# EAGLE board Board (EAGLE 9.7.0)
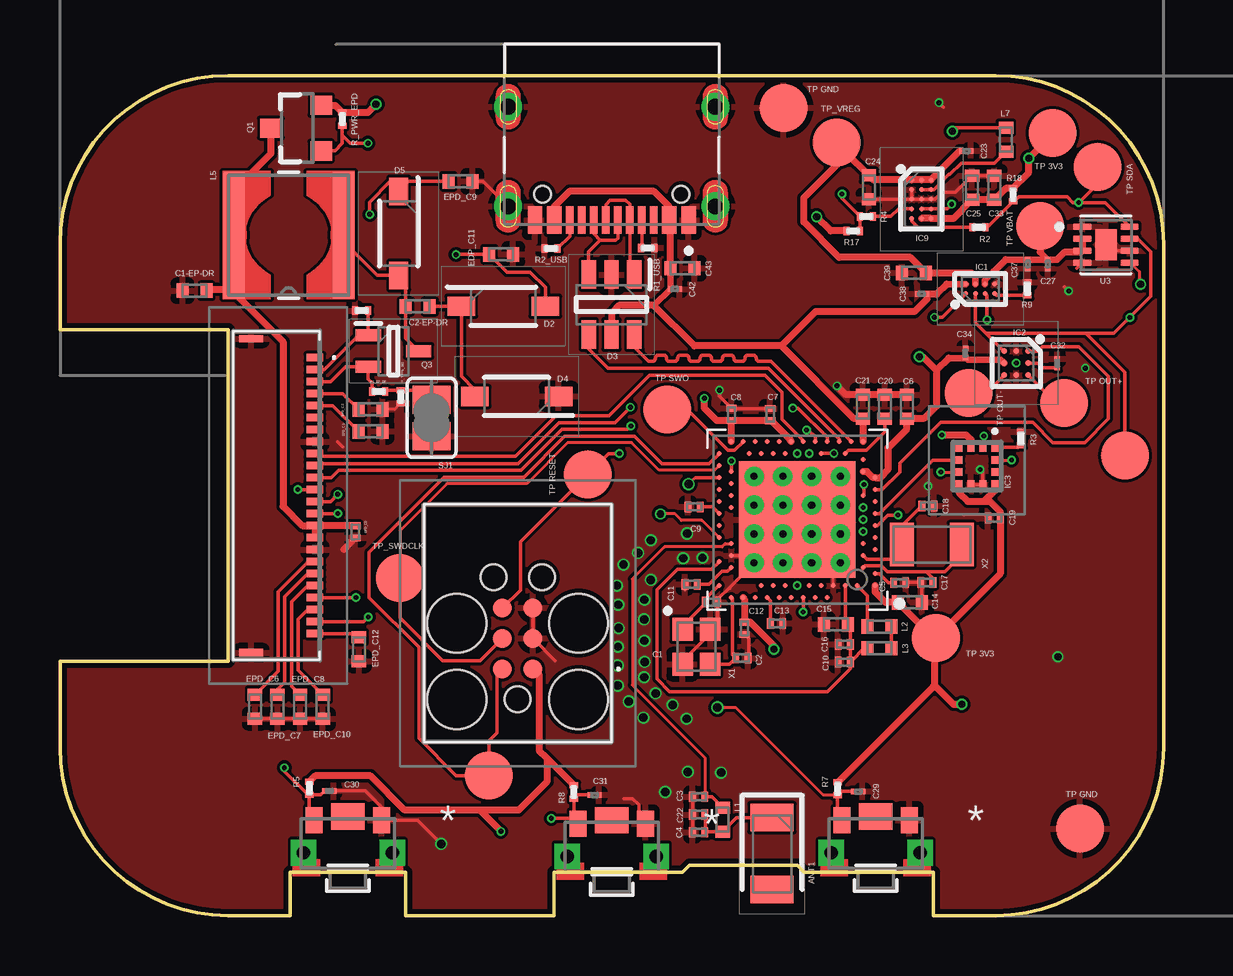
[diagram p0: board, top side]
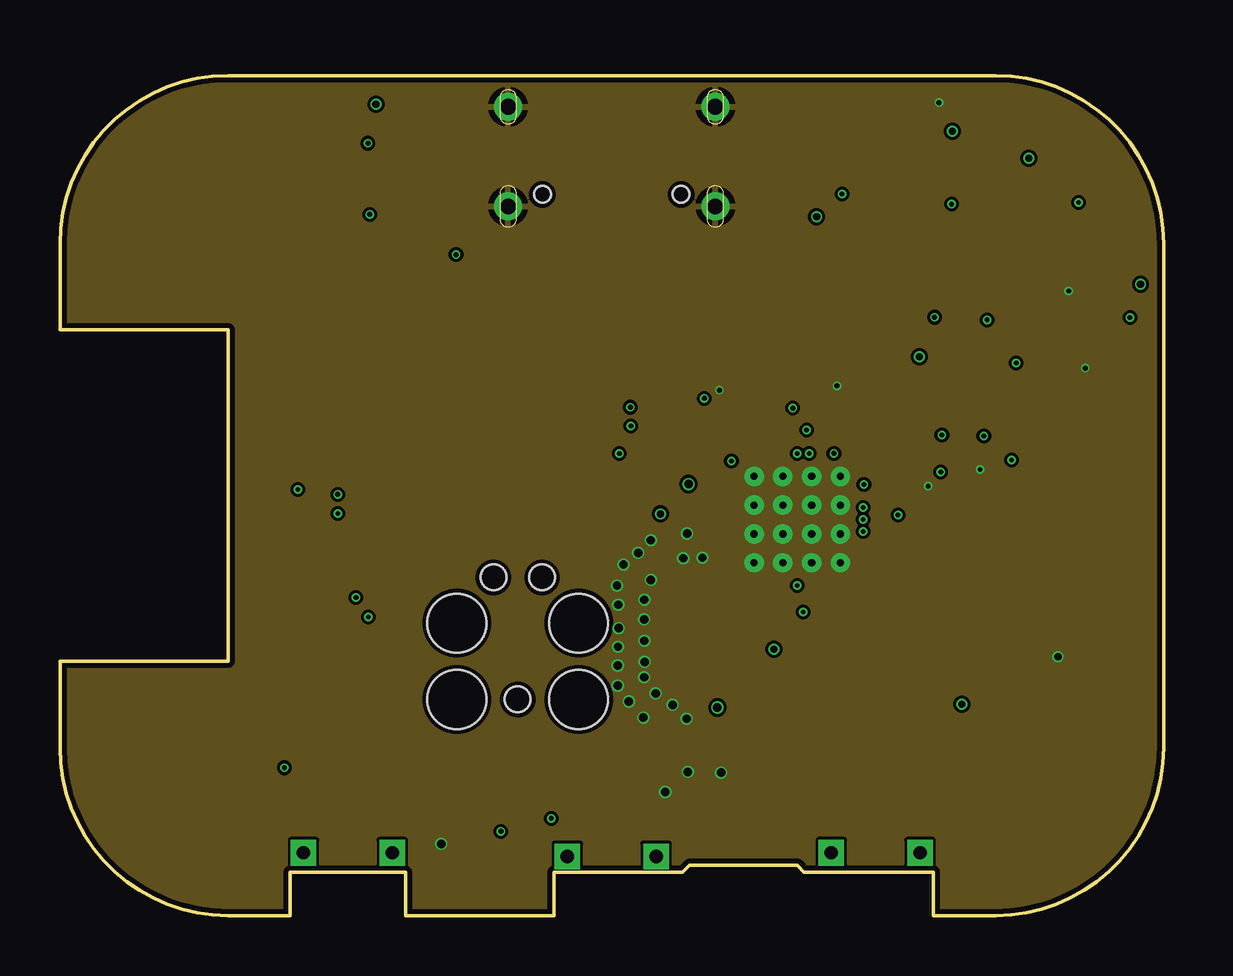
[diagram p1: board, inner layer Route2]
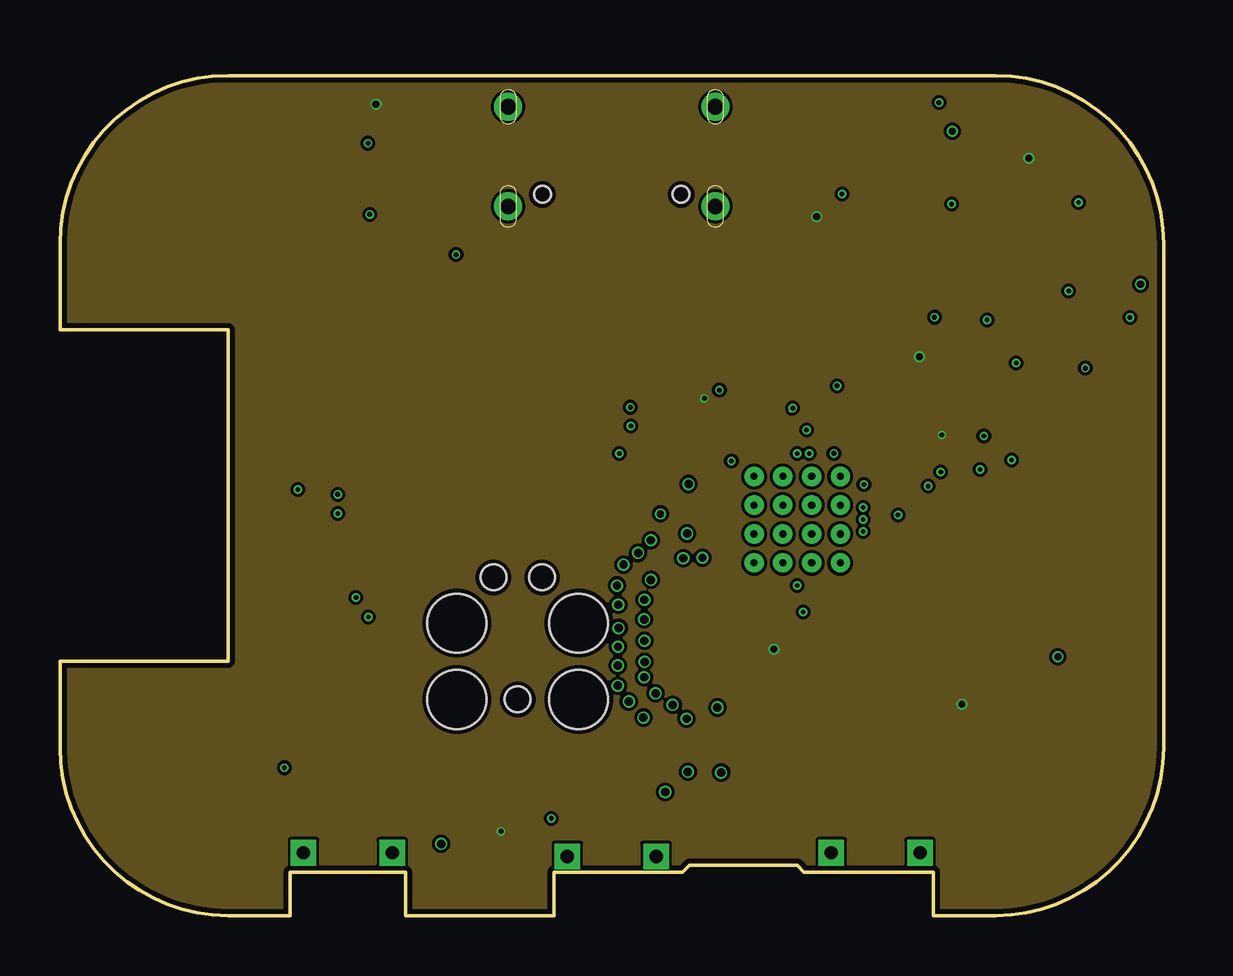
[diagram p2: board, inner layer Route15]
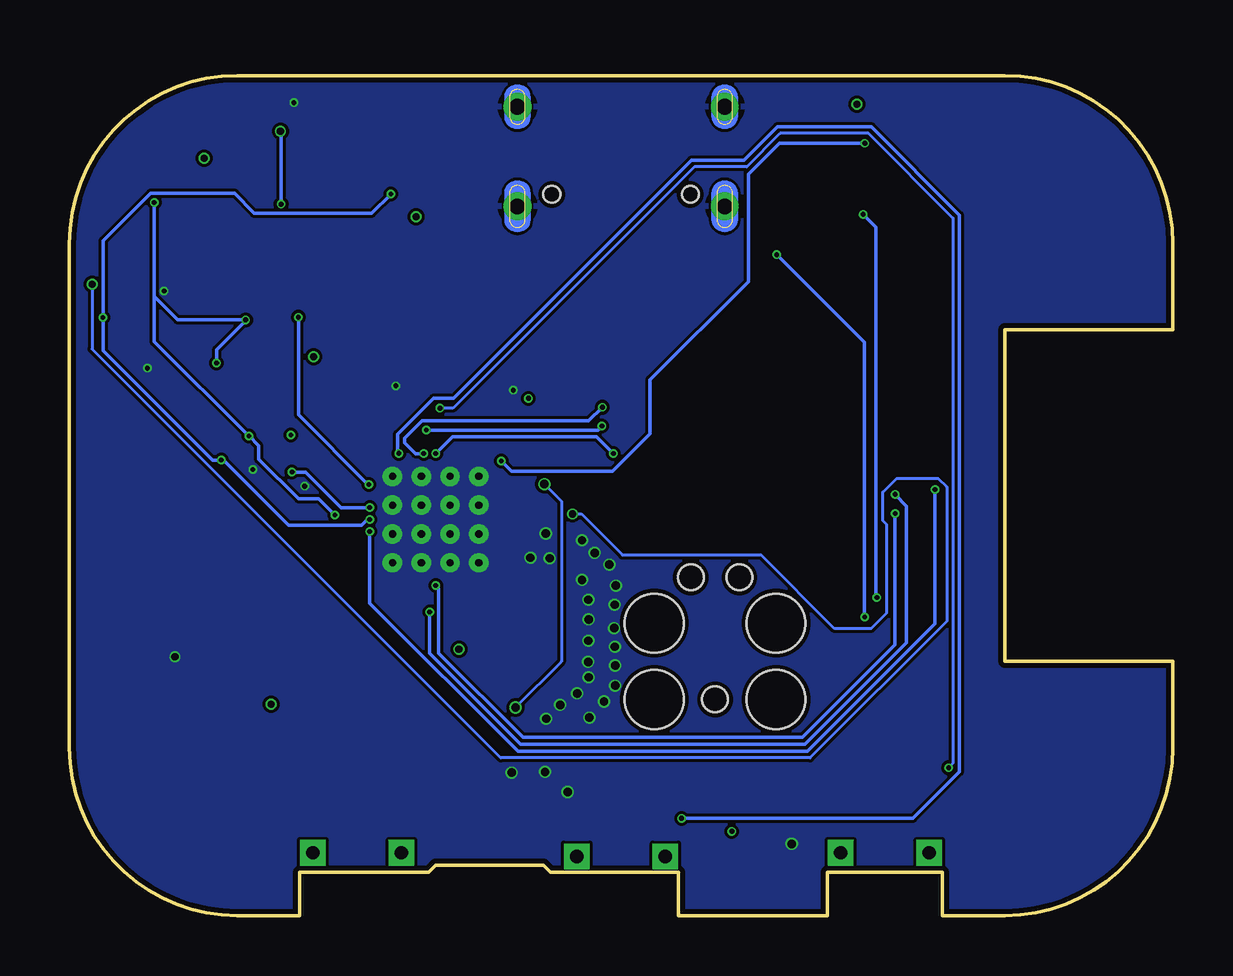
[diagram p3: board, bottom side, seen from below]

Size 46 x 35 mm. Coordinates in mm from the lower left corner, seen from the top.
Outline: 39,0 36.4,0 36.4,1.8 31.6,1.8 31.02,1.8 30.73,2.09 26.24,2.09 25.95,1.8 25.4,1.8 20.6,1.8 20.6,0 14.4,0 14.4,1.8 9.6,1.8 9.6,0 7,0 arc-90 0,7 0,10.6 7,10.6 7,24.4 0,24.4 0,28 arc-90 7,35 39,35 arc-90 46,28 46,7 arc-90 39,0
Copper layers (1+2*15+16): Top 0.035mm / dielectric 1.6mm / Route2 0.035mm / dielectric 0.15mm / Route15 0.035mm / dielectric 0.2mm / Bottom 0.035mm
Design rules "jlcpcb-2layers.dru *": minimum track width 5mil, minimum drill 0.2mm, track to track 5mil, track to pad 5mil, pad to pad 5mil, via to via 5mil, smd to smd 5mil, copper to edge 0.2mm, drill to drill 6mil, minimum pad ring 10mil, minimum via ring 3mil, stop-mask expansion 4mil, vias tented up to drill 999mm, thermal gap 10mil

## Footprints (pad centres in the part's own frame; a part is rotated, then mirrored left to right if it is on the bottom)
2450AT18B100E_ANTC3216X140N = smd 1.15 x 1.8: 1 -1.5,0; 2 1.5,0
NORDIC_NRF_3_RESC0201_L = smd 0.28 x 0.43: 1 -0.255,0; 2 0.255,0
NORDIC_NRF_3_RESC0402_L = smd 0.5 x 0.6: 1 -0.5,0; 2 0.5,0
GRM011R60J152KE01L_2_CAPC0201X13N = smd 0.22 x 0.23: 1 -0.185,0; 2 0.185,0
ESP32_C6_LIBRARY_5_SOD3716X135N = smd 1.15 x 0.8: 1 -1.75,0; 2 1.75,0
ESP32_C6_LIBRARY_3_SOT95P280X145-6N = smd 1.2 x 0.6: 1 -1.25,0.95; 2 -1.25,0; 3 -1.25,-0.95; 4 1.25,-0.95; 5 1.25,0; 6 1.25,0.95
BQ25180YBGR_BGA8C40P2X4_100X155X50 = smd 0.2 x 0.2: A1 -0.2,0.6; A2 0.2,0.6; B1 -0.2,0.2; B2 0.2,0.2; C1 -0.2,-0.2; C2 0.2,-0.2; D1 -0.2,-0.6; D2 0.2,-0.6
DRV2605YZFR_BGA9C50P3X3_144X144X62 = smd 0.25 x 0.25: A1 -0.5,0.5; A2 0,0.5; A3 0.5,0.5; B1 -0.5,0; B2 0,0; B3 0.5,0; C1 -0.5,-0.5; C2 0,-0.5; C3 0.5,-0.5
BMA423_BMA423 = smd 0.3 x 0.35: 1 -0.75,-0.775; 2 -0.25,-0.775; 3 0.25,-0.775; 4 0.75,-0.775; 7 0.75,0.775; 8 0.25,0.775; 9 -0.25,0.775; 10 -0.75,0.775 | smd 0.35 x 0.3: 5 0.775,-0.25; 6 0.775,0.25; 11 -0.775,0.25; 12 -0.775,-0.25
RT6160AWSC_BGA15C40P3X5_140X230X60 = smd 0.216 x 0.216: A1 -0.4,0.8; A2 0,0.8; A3 0.4,0.8; B1 -0.4,0.4; B2 0,0.4; B3 0.4,0.4; C1 -0.4,0; C2 0,0; C3 0.4,0; D1 -0.4,-0.4; D2 0,-0.4; D3 0.4,-0.4; E1 -0.4,-0.8; E2 0,-0.8; E3 0.4,-0.8
503480-2400_5034802400 = smd 0.3 x 0.7: 1 -5.75,1.525; 2 -5.25,1.525; 3 -4.75,1.525; 4 -4.25,1.525; 5 -3.75,1.525; 6 -3.25,1.525; 7 -2.75,1.525; 8 -2.25,1.525; 9 -1.75,1.525; 10 -1.25,1.525; 11 -0.75,1.525; 12 -0.25,1.525; 13 0.25,1.525; 14 0.75,1.525; 15 1.25,1.525; 16 1.75,1.525; 17 2.25,1.525; 18 2.75,1.525; 19 3.25,1.525; 20 3.75,1.525; 21 4.25,1.525; 22 4.75,1.525; 23 5.25,1.525; 24 5.75,1.525 | smd 0.3 x 1: MP1 -6.54,-1.125; MP2 6.54,-1.125
TC2030-IDC_TC2030IDC = smd 0.783 x 0.783: 1 -0.953,-0.635; 2 -0.953,0.635; 3 0.317,-0.635; 4 0.317,0.635; 5 1.588,-0.635; 6 1.588,0.635 | hole 2.451: -2.223,-2.54; -2.223,2.54; 0.952,-2.54; 0.952,2.54 | hole 1.067: -2.223,0; 2.857,-1.016; 2.857,1.016
KH-TYPE-C-16P_KINGHELM_KH-TYPE-C-16P = smd 0.6 x 1.15: A1_B12 -3.2,4.725; A4_B9 -2.4,4.725; A9_B4 2.4,4.725; A12_B1 3.2,4.725 | smd 0.3 x 1.15: A5 -1.25,4.725; A6 -0.25,4.725; A7 0.25,4.725; A8 1.25,4.725; B5 1.75,4.725; B6 0.75,4.725; B7 -0.75,4.725; B8 -1.75,4.725 | drill 0.65 pad 1.05: SH1 -4.32,0; SH2 4.32,0; SH3 -4.32,4.15; SH4 4.32,4.15 | hole 0.7: -2.89,3.65; 2.89,3.65
NORDIC_NRF_2_RESC0402_L = smd 0.5 x 0.6: 1 -0.5,0; 2 0.5,0
ESP32_C6_LIBRARY_2_IND_4828-WE-TPC_WRE = smd 0.9 x 5.3: 1 -2.286,0; 2 2.286,0
ESP32_C6_LIBRARY_4_ESP32_C6_LIBRARY_4_ESP32_C6_LIBRARY_4_ESP32_C6_LIBRARY_4_ESP32_WROVER_SPARKFUN-DISCRETESEMI_SOT23-3 = smd 0.8 x 0.9: 1 -0.95,-1; 2 0.95,-1; 3 0,1.1
ESP32_C6_LIBRARY_6_SOT65P210X110-3N = smd 1.05 x 0.5: 1 -1.05,0.65; 2 -1.05,-0.65; 3 1.05,0
CPF0201D7K68C1_0201 = smd 0.35 x 0.25: 1 0,0.275; 2 0,-0.275
ESP32_C6_LIBRARY_7_JUMPER_SJ = smd 1.168 x 1.6: 1 -0.762,0; 2 0.762,0
2025-10-22_07-23-44_LIBRARY_SW_EVP-AKE31A_PAN = smd 0.711 x 1.092: 1 -1.4,-0.972; 2 1.4,-0.972 | drill 0.559 pad 0.914 square: 3 -1.848,0.381; 4 1.848,0.381 | smd 1.397 x 1.092: 5 0,-1.124
HECTOR_WATCH_1_TP20R = smd 2 x 2: TP 0,0
NORDIC_NRF_4_AQFN50P700X700X85_HS-74N = smd 4.85 x 4.85: P$74 0,0 | drill 0.3 pad 0.6: P$75 -1.8,1.8; P$76 -0.6,1.8; P$77 0.6,1.8; P$78 1.8,1.8; P$79 -1.8,0.6; P$80 -0.6,0.6; P$81 0.6,0.6; P$82 1.8,0.6; P$83 -1.8,-0.6; P$84 -0.6,-0.6; P$85 0.6,-0.6; P$86 1.8,-0.6; P$87 -1.8,-1.8; P$88 -0.6,-1.8; P$89 0.6,-1.8; P$90 1.8,-1.8 | smd 0.2 x 0.2: P$A8 -1.25,3.25; P$A10 -0.75,3.25; P$A12 -0.25,3.25; P$A14 0.25,3.25; P$A16 0.75,3.25; P$A18 1.25,3.25; P$A20 1.75,3.25; P$A22 2.25,3.25; P$A23 2.75,3.25; P$AA24 3.25,-2.25; P$AB2 -2.75,-2.5; P$AC5 -2,-2.75; P$AC9 -1,-2.75; P$AC11 -0.5,-2.75; P$AC13 0,-2.75; P$AC15 0.5,-2.75; P$AC17 1,-2.75; P$AC19 1.5,-2.75; P$AC21 2,-2.75; P$AC24 3.25,-2.75; P$AD2 -2.75,-3.25; P$AD4 -2.25,-3.25; P$AD6 -1.75,-3.25; P$AD8 -1.25,-3.25; P$AD10 -0.75,-3.25; P$AD12 -0.25,-3.25; P$AD14 0.25,-3.25; P$AD16 0.75,-3.25; P$AD18 1.25,-3.25; P$AD20 1.75,-3.25; P$AD22 2.25,-3.25; P$AD23 2.75,-3.25; P$B1 -3.25,2.75; P$B3 -2.5,2.75; P$B5 -2,2.75; P$B7 -1.5,2.75; P$B9 -1,2.75; P$B11 -0.5,2.75; P$B13 0,2.75; P$B15 0.5,2.75; P$B17 1,2.75; P$B19 1.5,2.75; P$B24 3.25,2.75; P$C1 -3.25,2.25; P$D2 -2.75,2; P$D23 2.75,2; P$E24 3.25,1.75; P$F2 -2.75,1.5; P$F23 2.75,1.5; P$G1 -3.25,1.25; P$H2 -2.75,1; P$H23 2.75,1; P$J1 -3.25,0.75; P$J24 3.25,0.75; P$K2 -2.75,0.5; P$L1 -3.25,0.25; P$L24 3.25,0.25; P$M2 -2.75,0; P$N1 -3.25,-0.25; P$N24 3.25,-0.25; P$P2 -2.75,-0.5; P$P23 2.75,-0.5; P$R1 -3.25,-0.75; P$R24 3.25,-0.75; P$T2 -2.75,-1; P$T23 2.75,-1; P$U1 -3.25,-1.25; P$U24 3.25,-1.25; P$V23 2.75,-1.5; P$W1 -3.25,-1.75; P$W24 3.25,-1.75; P$Y2 -2.75,-2; P$Y23 2.75,-2
ESP32_C6_LIBRARY_SON50P200X200X80-9N = smd 0.76 x 0.27: 1 -0.985,0.75; 2 -0.985,0.25; 3 -0.985,-0.25; 4 -0.985,-0.75; 5 0.985,-0.75; 6 0.985,-0.25; 7 0.985,0.25; 8 0.985,0.75 | smd 0.9 x 1.3: 9 0,0
NORDIC_NRF_BT-XTAL_2016_N = smd 0.95 x 0.85: 1 -0.725,-0.575; 2 0.725,-0.575; 3 0.725,0.575; 4 -0.725,0.575
NORDIC_NRF_1_XTAL_3215_N = smd 1 x 1.8: 1 -1.25,0; 2 1.25,0

## Placement (x,y rotation side)
ANT1  2450AT18B100E  [2450AT18B100E_ANTC3216X140N]  29.68,2.58 270 top
C1  12pF  [NORDIC_NRF_3_RESC0201_L]  27.16,13.06 0 top
C1-EP-DR  10μF  [NORDIC_NRF_3_RESC0402_L]  5.61,26.04 180 top
C2  12pF  [NORDIC_NRF_3_RESC0201_L]  28.42,10.73 0 top
C2-EP-DR  4.7μF/25V  [NORDIC_NRF_3_RESC0402_L]  14.91,25.38 180 top
C3  1pF  [NORDIC_NRF_3_RESC0201_L]  26.62,4.95 180 top
C4  1pF  [NORDIC_NRF_3_RESC0201_L]  26.62,3.47 180 top
C5  100nF  [NORDIC_NRF_3_RESC0201_L]  35,13.87 0 top
C6  4.7µF  [NORDIC_NRF_3_RESC0402_L]  35.3,21.21 90 top
C7  100nF  [NORDIC_NRF_3_RESC0201_L]  29.6,20.87 90 top
C8  100nF  [NORDIC_NRF_3_RESC0201_L]  27.99,20.88 90 top
C9  820pF  [NORDIC_NRF_3_RESC0201_L]  26.43,17.03 180 top
C10  N.C.  [NORDIC_NRF_3_RESC0201_L]  32.69,10.56 180 top
C11  100pF  [NORDIC_NRF_3_RESC0201_L]  26.31,13.8 180 top
C12  100nF  [NORDIC_NRF_3_RESC0201_L]  28.53,11.97 270 top
C13  N.C.  [NORDIC_NRF_3_RESC0201_L]  29.87,12.17 0 top
C14  4.7µF  [NORDIC_NRF_3_RESC0402_L]  35.43,13.05 0 top
C15  1.0µF  [NORDIC_NRF_3_RESC0402_L]  32.34,12.13 180 top
C16  47nF  [NORDIC_NRF_3_RESC0201_L]  32.69,11.3 180 top
C17  12pF  [NORDIC_NRF_3_RESC0201_L]  36.13,13.88 0 top
C18  12pF  [NORDIC_NRF_3_RESC0201_L]  36.18,17.07 180 top
C19  100nF  [NORDIC_NRF_3_RESC0201_L]  38.94,16.56 180 top
C20  4.7µF  [NORDIC_NRF_3_RESC0402_L]  34.38,21.2 90 top
C21  4.7µF  [NORDIC_NRF_3_RESC0402_L]  33.47,21.21 90 top
C22  N.C.  [NORDIC_NRF_3_RESC0201_L]  26.62,4.21 180 top
C23  0.1μF  [GRM011R60J152KE01L_2_CAPC0201X13N]  37.78,31.86 180 top
C24  10μF  [NORDIC_NRF_3_RESC0402_L]  33.72,30.34 90 top
C25  22μF  [NORDIC_NRF_3_RESC0402_L]  38.02,30.32 90 top
C27  0.1μF  [GRM011R60J152KE01L_2_CAPC0201X13N]  41.17,27.15 90 top
C29  1μF  [GRM011R60J152KE01L_2_CAPC0201X13N]  33.27,5.17 180 top
C30  1μF  [GRM011R60J152KE01L_2_CAPC0201X13N]  11.23,5.2 180 top
C31  1μF  [GRM011R60J152KE01L_2_CAPC0201X13N]  22.28,5.03 180 top
C32  1μF  [GRM011R60J152KE01L_2_CAPC0201X13N]  41.57,23.01 270 top
C33  22μF  [NORDIC_NRF_3_RESC0402_L]  38.94,30.32 90 top
C34  0.1μF  [GRM011R60J152KE01L_2_CAPC0201X13N]  37.74,23.44 270 top
C37  1μF  [GRM011R60J152KE01L_2_CAPC0201X13N]  40.34,27.15 90 top
C38  1μF  [GRM011R60J152KE01L_2_CAPC0201X13N]  35.92,25.9 0 top
C39  10μF  [NORDIC_NRF_3_RESC0402_L]  35.6,26.78 180 top
C42  0.1μF  [GRM011R60J152KE01L_2_CAPC0201X13N]  25.63,26.1 0 top
C43  4.7μF  [NORDIC_NRF_3_RESC0402_L]  25.95,26.97 0 top
D2  MBR0530  [ESP32_C6_LIBRARY_5_SOD3716X135N]  18.48,25.39 0 top
D3  USBLC6-2SC6Y  [ESP32_C6_LIBRARY_3_SOT95P280X145-6N]  22.99,25.46 270 top
D4  MBR0530  [ESP32_C6_LIBRARY_5_SOD3716X135N]  19.04,21.63 180 top
D5  MBR0530  [ESP32_C6_LIBRARY_5_SOD3716X135N]  14.12,28.42 270 top
EPD_C1  1μF/50V  [NORDIC_NRF_3_RESC0402_L]  12.94,20.17 180 top
EPD_C2  1μF/50V  [NORDIC_NRF_3_RESC0402_L]  12.94,21.09 180 top
EPD_C5  0.1μF/50V  [NORDIC_NRF_3_RESC0201_L]  12.31,15.99 90 top
EPD_C6  1μF/50V  [NORDIC_NRF_3_RESC0402_L]  8.13,8.71 270 top
EPD_C7  1μF/50V  [NORDIC_NRF_3_RESC0402_L]  9.07,8.71 270 top
EPD_C8  1μF/50V  [NORDIC_NRF_3_RESC0402_L]  10.01,8.7 270 top
EPD_C9  1μF/50V  [NORDIC_NRF_3_RESC0402_L]  16.69,30.59 0 top
EPD_C10  1μF/50V  [NORDIC_NRF_3_RESC0402_L]  10.95,8.7 270 top
EPD_C11  1μF/50V  [NORDIC_NRF_3_RESC0402_L]  18.39,27.55 0 top
EPD_C12  1μF/50V  [NORDIC_NRF_3_RESC0402_L]  12.46,11.1 270 top
IC1  BQ25180YBGR  [BQ25180YBGR_BGA8C40P2X4_100X155X50]  38.36,26.11 90 top
IC2  DRV2605YZFR  [DRV2605YZFR_BGA9C50P3X3_144X144X62]  39.86,23.02 270 top
IC3  BMA423_BMA423  [BMA423_BMA423]  38.22,18.73 180 top
IC9  RT6160AWSC  [RT6160AWSC_BGA15C40P3X5_140X230X60]  35.91,29.85 0 top
J1  503480-2400  [503480-2400_5034802400]  9.1,17.5 270 top
J2  TC2030-IDC  [TC2030-IDC_TC2030IDC]  19.08,11.23 90 top
J4  KH-TYPE-C-16P  [KH-TYPE-C-16P_KINGHELM_KH-TYPE-C-16P]  23,33.7 180 top
L1  3.9nH  [NORDIC_NRF_2_RESC0402_L]  27.62,4 270 top
L2  10µH  [NORDIC_NRF_2_RESC0402_L]  34.15,12.04 0 top
L3  15nH  [NORDIC_NRF_2_RESC0402_L]  34.16,11.14 180 top
L5  68uH  [ESP32_C6_LIBRARY_2_IND_4828-WE-TPC_WRE]  9.53,28.35 180 top
L7  [NORDIC_NRF_2_RESC0402_L]  39.43,32.33 90 top
Q1  20V/4.2A/52mΩ/1.4W  [ESP32_C6_LIBRARY_4_ESP32_C6_LIBRARY_4_ESP32_C6_LIBRARY_4_ESP32_C6_LIBRARY_4_ESP32_WROVER_SPARKFUN-DISCRETESEMI_SOT23-3]  9.89,32.81 90 top
Q3  SI1308EDL-T1-GE3  [ESP32_C6_LIBRARY_6_SOT65P210X110-3N]  13.9,23.52 0 top
R1_EP_DR  0.47  [CPF0201D7K68C1_0201]  13.28,21.83 270 top
R1_USB  5K1  [CPF0201D7K68C1_0201]  24.5,27.82 270 top
R2  0  [CPF0201D7K68C1_0201]  38.3,28.68 270 top
R2_EP_DR  10K  [CPF0201D7K68C1_0201]  12.57,25.21 90 top
R2_USB  5K1  [CPF0201D7K68C1_0201]  20.47,27.8 270 top
R3  0  [CPF0201D7K68C1_0201]  40.05,19.88 0 top
R4  0  [CPF0201D7K68C1_0201]  33.62,29.13 90 top
R5  10K  [CPF0201D7K68C1_0201]  10.39,5.3 180 top
R7  10K  [CPF0201D7K68C1_0201]  32.41,5.29 180 top
R8  10K  [CPF0201D7K68C1_0201]  21.42,5.15 180 top
R9  10K  [CPF0201D7K68C1_0201]  40.32,26.12 0 top
R17  3K3  [CPF0201D7K68C1_0201]  33.06,28.53 90 top
R18  3K3  [CPF0201D7K68C1_0201]  39.73,30.03 0 top
R_PWR_EPD  10K  [CPF0201D7K68C1_0201]  11.77,33.19 180 top
R_TYPE_SEL  2.2  [CPF0201D7K68C1_0201]  14.21,21.62 180 top
SJ1  [ESP32_C6_LIBRARY_7_JUMPER_SJ]  15.49,20.74 90 top
SW_DN  2025-10-22_07-23-44_LIBRARY_EVP-AKE31ASW_EVP-AKE31A_PAN  [2025-10-22_07-23-44_LIBRARY_SW_EVP-AKE31A_PAN]  34,3 180 top
SW_ENT  2025-10-22_07-23-44_LIBRARY_EVP-AKE31ASW_EVP-AKE31A_PAN  [2025-10-22_07-23-44_LIBRARY_SW_EVP-AKE31A_PAN]  23,2.85 180 top
SW_UP  2025-10-22_07-23-44_LIBRARY_EVP-AKE31ASW_EVP-AKE31A_PAN  [2025-10-22_07-23-44_LIBRARY_SW_EVP-AKE31A_PAN]  12,3 180 top
TP_3.3V  HECTOR_WATCH_1_TPTP20R  [HECTOR_WATCH_1_TP20R]  36.51,11.56 0 top
TP_3V3  HECTOR_WATCH_1_TPTP20R  [HECTOR_WATCH_1_TP20R]  41.37,32.6 0 top
TP_BAT_GND  HECTOR_WATCH_1_TPTP20R  [HECTOR_WATCH_1_TP20R]  30.16,33.65 90 top
TP_GND  HECTOR_WATCH_1_TPTP20R  [HECTOR_WATCH_1_TP20R]  42.52,3.62 0 top
TP_ON  HECTOR_WATCH_1_TPTP20R  [HECTOR_WATCH_1_TP20R]  37.88,21.77 180 top
TP_OP  HECTOR_WATCH_1_TPTP20R  [HECTOR_WATCH_1_TP20R]  41.86,21.35 180 top
TP_RESET  HECTOR_WATCH_1_TPTP20R  [HECTOR_WATCH_1_TP20R]  22,18.38 0 top
TP_SCL  HECTOR_WATCH_1_TPTP20R  [HECTOR_WATCH_1_TP20R]  44.39,19.17 0 top
TP_SDA  HECTOR_WATCH_1_TPTP20R  [HECTOR_WATCH_1_TP20R]  43.25,31.2 270 top
TP_SWDCLK  HECTOR_WATCH_1_TPTP20R  [HECTOR_WATCH_1_TP20R]  14.17,14.07 90 top
TP_SWDIO  HECTOR_WATCH_1_TPTP20R  [HECTOR_WATCH_1_TP20R]  17.88,5.83 90 top
TP_SWO  HECTOR_WATCH_1_TPTP20R  [HECTOR_WATCH_1_TP20R]  25.32,21.08 0 top
TP_VBAT  HECTOR_WATCH_1_TPTP20R  [HECTOR_WATCH_1_TP20R]  40.86,28.74 0 top
TP_VREG  HECTOR_WATCH_1_TPTP20R  [HECTOR_WATCH_1_TP20R]  32.37,32.22 0 top
U1  NORDIC_NRF_4_NRF52840_QF  [NORDIC_NRF_4_AQFN50P700X700X85_HS-74N]  30.73,16.5 180 top
U3  MAX17048G+T10  [ESP32_C6_LIBRARY_SON50P200X200X80-9N]  43.6,27.95 0 top
X1  32MHz  [NORDIC_NRF_BT-XTAL_2016_N]  26.53,11.2 270 top
X2  32.768kHz  [NORDIC_NRF_1_XTAL_3215_N]  36.34,15.46 180 top

## Library data of the parts
ANT1 = InkTime_v5; ARROW_PART_NUMBER: 2450AT18B100E; ARROW_PRICE-STOCK: https://www.arrow.com/en/products/2450at18b100e/johanson-dielectrics?utm_currency=USD&region=nac; DESCRIPTION: Antennas 2.45GHz ANTENNA; HEIGHT: 1.4mm; MANUFACTURER_NAME: JOHANSON TECHNOLOGY; MANUFACTURER_PART_NUMBER: 2450AT18B100E; MOUSER_PART_NUMBER: 609-2450AT18B100E; MOUSER_PRICE-STOCK: https://www.mouser.co.uk/ProductDetail/Johanson-Technology/2450AT18B100E?qs=yCnrNFeXz%252Bh5MFsFIXGZGA%3D%3D
C1 C1-EP-DR C2 C2-EP-DR C3-C22 C24 C25 C33 C39 C43 EPD_C1 EPD_C2 EPD_C5-EPD_C12 L1-L3 L7 R1_EP_DR R1_USB R2 R2_EP_DR R2_USB R3-R5 R7-R9 R17 R18 R_PWR_EPD R_TYPE_SEL SJ1 TP_3.3V TP_3V3 TP_BAT_GND TP_GND TP_ON TP_OP TP_RESET TP_SCL TP_SDA TP_SWDCLK TP_SWDIO TP_SWO TP_VBAT TP_VREG U1 X1 X2 = InkTime_v5
C23 C27 C29-C32 C34 C37 C38 C42 = InkTime_v5; AVAILABILITY: In Stock; CHECK_PRICES: https://www.snapeda.com/parts/GRM011R60J152KE01L/Murata/view-part/?ref=eda; DESCRIPTION: SMD Capacitor X5R(EIA) with Capacitance: 1500pF Tol. 10%. Rated Voltage: 6.3Vdc; MF: Murata; MP: GRM011R60J152KE01L; PACKAGE: 0201 Murata; PRICE: None; SNAPEDA_LINK: https://www.snapeda.com/parts/GRM011R60J152KE01L/Murata/view-part/?ref=snap
D2 D4 D5 = InkTime_v5; AVAILABILITY: In Stock; CHECK_PRICES: https://www.snapeda.com/parts/MBR0530/Onsemi/view-part/?ref=eda; DESCRIPTION: Diode Schottky 30 V 500mA Surface Mount SOD-123; MF: ON Semiconductor; MP: MBR0530; PACKAGE: SOD-123-2 ON Semiconductor; PRICE: None; PURCHASE-URL: https://www.snapeda.com/api/url_track_click_mouser/?unipart_id=179458&manufacturer=ON Semiconductor&part_name=MBR0530&search_term=None; SNAPEDA_LINK: https://www.snapeda.com/parts/MBR0530/Onsemi/view-part/?ref=snap
D3 = InkTime_v5; AVAILABILITY: In Stock; CHECK_PRICES: https://www.snapeda.com/parts/USBLC6-2SC6Y/STMicroelectronics/view-part/?ref=eda; DESCRIPTION: 17V Clamp 5A (8/20µs) Ipp Tvs Diode Surface Mount SOT-23-6; MF: STMicroelectronics; MP: USBLC6-2SC6Y; PACKAGE: SOT-23-6 STMicroelectronics; PRICE: None; SNAPEDA_LINK: https://www.snapeda.com/parts/USBLC6-2SC6Y/STMicroelectronics/view-part/?ref=snap
IC1 = InkTime_v5; ARROW_PART_NUMBER: BQ25180YBGR; ARROW_PRICE-STOCK: https://www.arrow.com/en/products/bq25180ybgr/texas-instruments?utm_currency=USD&region=nac; DESCRIPTION: Charger IC Lithium Ion/Polymer, Lithium Iron Phosphate 8-DSBGA (1.6x1.1); HEIGHT: 0.5mm; MANUFACTURER_NAME: Texas Instruments; MANUFACTURER_PART_NUMBER: BQ25180YBGR; MOUSER_PART_NUMBER: 595-BQ25180YBGR; MOUSER_PRICE-STOCK: https://www.mouser.co.uk/ProductDetail/Texas-Instruments/BQ25180YBGR?qs=doiCPypUmgEWjAK%252BJAX6Tw%3D%3D
IC2 = InkTime_v5; ARROW_PART_NUMBER: DRV2605YZFR; ARROW_PRICE-STOCK: https://www.arrow.com/en/products/drv2605yzfr/texas-instruments?region=nac; DESCRIPTION: Haptic Driver for ERM/LRA with Built-In Library and Smart Loop Architecture; HEIGHT: 0.625mm; MANUFACTURER_NAME: Texas Instruments; MANUFACTURER_PART_NUMBER: DRV2605YZFR
IC3 = InkTime_v5; ARROW_PART_NUMBER: BMA423; ARROW_PRICE-STOCK: https://www.arrow.com/en/products/bma423/bosch; DESCRIPTION: Accelerometers Triaxial low-g 12bit Acceleration Sensor; HEIGHT: 1mm; MANUFACTURER_NAME: BOSCH; MANUFACTURER_PART_NUMBER: BMA423; MOUSER_PART_NUMBER: 262-BMA423; MOUSER_PRICE-STOCK: https://www.mouser.co.uk/ProductDetail/Bosch-Sensortec/BMA423?qs=HXFqYaX1Q2xC%252BSgeGoX3mg%3D%3D
IC9 = InkTime_v5; DESCRIPTION: Buck-Boost Regulator Positive Output Step-Up/Step-Down I2C DC-DC Controller IC 15-WL-CSP (BSC) (1.4x2.3); HEIGHT: 0.6mm; MANUFACTURER_NAME: RICHTEK; MANUFACTURER_PART_NUMBER: RT6160AWSC; MOUSER_PART_NUMBER: 835-RT6160AWSC; MOUSER_PRICE-STOCK: https://www.mouser.co.uk/ProductDetail/Richtek/RT6160AWSC?qs=amGC7iS6iy%2FLd9PSoixZXQ%3D%3D
J1 = InkTime_v5; DESCRIPTION: FFC & FPC Connectors 0.5mm FPC RA SMT Dual Contact 24Ckt; HEIGHT: 1.87mm; MANUFACTURER_NAME: Molex; MANUFACTURER_PART_NUMBER: 503480-2400; MOUSER_PART_NUMBER: 538-503480-2400; MOUSER_PRICE-STOCK: https://www.mouser.co.uk/ProductDetail/Molex/503480-2400?qs=OAhjpuo3Vu7efIoxFh9AOw%3D%3D
J2 = InkTime_v5; DESCRIPTION: CABLE ADAPTER 6 POS; HEIGHT: 19mm; MANUFACTURER_NAME: Tag Connect; MANUFACTURER_PART_NUMBER: TC2030-IDC
J4 = InkTime_v5; AVAILABILITY: Not in stock; CHECK_PRICES: https://www.snapeda.com/parts/KH-TYPE-C-16P/Kinghelm/view-part/?ref=eda; MF: kinghelm; MP: KH-TYPE-C-16P; PACKAGE: None; PRICE: None; SNAPEDA_LINK: https://www.snapeda.com/parts/KH-TYPE-C-16P/Kinghelm/view-part/?ref=snap
L5 = InkTime_v5; COPYRIGHT: Copyright (C) 2024 Ultra Librarian. All rights reserved.; MANUFACTURER_PART_NUMBER: 744043680; MFR_NAME: Wurth Electronics
Q1 = InkTime_v5; PROD_ID: TRAN-14388
Q3 = InkTime_v5; AVAILABILITY: In Stock; CHECK_PRICES: https://www.snapeda.com/parts/SI1308EDL-T1-GE3/Vishay+Siliconix/view-part/?ref=eda; DESCRIPTION: Si1308EDL-T1-GE3 N-channel MOSFET Transistor, 1.5 A, 30 V, 3-Pin SC-70 | Siliconix / Vishay SI1308EDL-T1-GE3; MF: Vishay Siliconix; MP: SI1308EDL-T1-GE3; PACKAGE: SOT-323 Vishay Semiconductor; PRICE: None; PURCHASE-URL: https://www.snapeda.com/api/url_track_click_mouser/?unipart_id=274603&manufacturer=Vishay Siliconix&part_name=SI1308EDL-T1-GE3&search_term=None; SNAPEDA_LINK: https://www.snapeda.com/parts/SI1308EDL-T1-GE3/Vishay+Siliconix/view-part/?ref=snap
SW_DN SW_ENT SW_UP = InkTime_v5; COPYRIGHT: Copyright (C) 2025 Ultra Librarian. All rights reserved.; DIGI-KEY_PART_NUMBER_1: P123437TR-ND; DIGI-KEY_PART_NUMBER_2: P123437CT-ND; DIGI-KEY_PART_NUMBER_3: P123437DKR-ND; MANUFACTURER_NAME: Panasonic; MANUFACTURER_PART_NUMBER: EVP-AKE31A
U3 = InkTime_v5; AVAILABILITY: In Stock; CHECK_PRICES: https://www.snapeda.com/parts/MAX17048G+T10/Analog+Devices/view-part/?ref=eda; DESCRIPTION: 3µA 1-Cell/2-Cell Fuel Gauge with ModelGauge; MF: Analog Devices; MP: MAX17048G+T10; PACKAGE: TDFN-8 Maxim; PRICE: None; PURCHASE-URL: https://www.snapeda.com/api/url_track_click_mouser/?unipart_id=329239&manufacturer=Analog Devices&part_name=MAX17048G+T10&search_term=None; SNAPEDA_LINK: https://www.snapeda.com/parts/MAX17048G+T10/Analog+Devices/view-part/?ref=snap

## Nets
3V3: C6.1 C7.1 C8.1 C12.1 C14.1 C19.1 C25.1 C33.1 C34.2 IC2.C2 IC3.3 IC3.7 IC3.10 IC9.E2 IC9.E3 J2.1 Q1.2 R5.2 R7.2 R8.2 R17.1 R18.1 R_PWR_EPD.2 TP_3.3V.TP TP_3V3.TP U1.P$A22 U1.P$AD14 U1.P$AD23 U1.P$B1 U1.P$W1 U1.P$Y2
ALERT: U1.P$J24 U3.5
D+: D3.4 U1.P$AD6
D-: D3.6 U1.P$AD4
DEC1: C5.1 U1.P$C1
DEC3: C11.1 U1.P$D23
DEC4_6: C10.1 C15.1 C16.1 L3.2 U1.P$B5 U1.P$E24
DN: D3.1 J4.A7 J4.B7
DP: D3.3 J4.A6 J4.B6
EPD_3V3: C1-EP-DR.1 EPD_C5.2 J1.15 J1.16 L5.2 Q1.3
EPD_BUSY: J1.9 U1.P$AD12
EPD_CS: J1.12 U1.P$K2
EPD_DC: J1.11 U1.P$AD10
EPD_RST: J1.10 U1.P$AC11
GDR: J1.2 Q3.1 R2_EP_DR.2
GND: C1-EP-DR.2 C1.2 C2.2 C3.2 C4.2 C5.2 C6.2 C7.2 C8.2 C9.2 C10.2 C11.2 C12.2 C13.2 C14.2 C15.2 C16.2 C17.1 C18.1 C19.2 C20.2 C21.2 C22.2 C23.1 C24.1 C25.2 C27.1 C29.1 C30.1 C31.1 C32.1 C33.2 C34.1 C37.1 C38.1 C39.2 C42.2 C43.2 D3.2 D4.1 EPD_C1.1 EPD_C2.1 EPD_C5.1 EPD_C6.2 EPD_C7.2 EPD_C8.2 EPD_C9.2 EPD_C10.2 EPD_C11.2 EPD_C12.2 IC1.D2 IC2.B1 IC2.B3 IC3.8 IC3.9 IC9.B1 IC9.C1 IC9.C2 IC9.C3 J1.8 J1.17 J1.MP1 J1.MP2 J2.3 J2.5 J4.A1_B12 J4.A12_B1 J4.SH1 J4.SH2 J4.SH3 J4.SH4 R1_USB.1 R2_EP_DR.1 R2_USB.2 R3.1 R9.1 R_TYPE_SEL.1 SJ1.1 SW_DN.1 SW_ENT.1 SW_UP.1 TP_BAT_GND.TP TP_GND.TP U1.P$74 U1.P$75 U1.P$76 U1.P$77 U1.P$78 U1.P$79 U1.P$80 U1.P$81 U1.P$82 U1.P$83 U1.P$84 U1.P$85 U1.P$86 U1.P$87 U1.P$88 U1.P$89 U1.P$90 U1.P$B7 U1.P$F23 U3.1 U3.4 U3.6 U3.9 X1.2 X1.4
HAPTIC_EN: IC2.A1 U1.P$U1
IMU_INT1: IC3.5 U1.P$N1
IMU_INT2: IC3.6 U1.P$P2
LX1: IC9.B2 IC9.B3 L7.1
LX2: IC9.D2 IC9.D3 L7.2
MOSI: J1.14 U1.P$B13
N$1: C9.1 U1.P$N24
N$2: ANT1.1 C4.1 C22.1 L1.2
N$3: C3.1 L1.1 U1.P$H23
N$4: C13.1 U1.P$A18
N$5: C2.1 U1.P$A23 X1.3
N$6: C1.1 U1.P$B24 X1.1
N$7: L2.2 L3.1
N$8: L2.1 U1.P$B3
N$9: C18.2 U1.P$F2 X2.2
N$10: C17.2 U1.P$D2 X2.1
N$11: IC3.1 R3.2
N$12: C20.1 U1.P$AC5
N$13: IC1.D1 R9.2
N$14: IC9.D1 R4.2
N$15: IC9.E1 R2.2
N$16: R1_EP_DR.1 R_TYPE_SEL.2 SJ1.2
N$17: C2-EP-DR.1 D2.1 D4.2
N$18: EPD_C2.2 J1.4
N$19: C2-EP-DR.2 D5.2 L5.1 Q3.3
N$20: EPD_C1.2 J1.5
N$21: EPD_C6.1 J1.18
N$22: C32.2 IC2.A2
N$23: EPD_C7.1 J1.19
N$24: EPD_C8.1 J1.20
N$25: EPD_C10.1 J1.22
N$28: EPD_C12.1 J1.24
N$29: J4.B5 R2_USB.1
N$30: J4.A5 R1_USB.2
OUT+: IC2.A3 TP_OP.TP
OUT-: IC2.C3 TP_ON.TP
P0.04: U1.P$J1
P0.09: U1.P$L24
P0.13: C30.2 R5.1 SW_UP.2 U1.P$AD8
P0.14: C31.2 R8.1 SW_ENT.2 U1.P$AC9
P0.19: U1.P$AC15
P0.20: U1.P$AD16
P0.21: U1.P$AC17
P0.22: U1.P$AD18
P0.23: U1.P$AC19
P0.24: U1.P$AD20
P0.25: U1.P$AC21
P0.26: U1.P$G1
P0.27: U1.P$H2
P0.28: U1.P$B11
P0.29: U1.P$A10
P0.30: U1.P$B9
P0.31: U1.P$A8
P1.01: Q1.1 R_PWR_EPD.1 U1.P$Y23
P1.02: C29.2 R7.1 SW_DN.2 U1.P$W24
P1.03: U1.P$V23
P1.04: U1.P$U24
P1.05: U1.P$T23
P1.06: U1.P$R24
P1.07: U1.P$P23
P1.09: U1.P$R1
P1.10: U1.P$A20
P1.11: U1.P$B19
P1.12: U1.P$B17
P1.13: U1.P$A16
P1.14: U1.P$B15
P1.15: U1.P$A14
PMIC_INT: IC1.A1 U1.P$T2
PREVGH: D5.1 EPD_C9.1 J1.21
PREVGL: D2.2 EPD_C11.1 J1.23
RESE: J1.3 Q3.2 R1_EP_DR.2
RESET: J2.6 TP_RESET.TP U1.P$AC13
SCK: J1.13 U1.P$A12
SCL: IC1.B1 IC2.C1 IC3.12 R4.1 R17.2 TP_SCL.TP U1.P$M2 U3.7
SDA: IC1.C1 IC2.B2 IC3.2 R2.1 R18.2 TP_SDA.TP U1.P$L1 U3.8
SWDCLK: J2.4 TP_SWDCLK.TP U1.P$AA24
SWDIO: J2.2 TP_SWDIO.TP U1.P$AC24
SWO: TP_SWO.TP U1.P$AD22
VBAT: C27.2 C37.2 IC1.C2 TP_VBAT.TP U3.2 U3.3
VBUS: C21.1 C38.2 C42.1 C43.1 D3.5 IC1.A2 J4.A4_B9 J4.A9_B4 U1.P$AD2
VREG: C23.2 C24.2 C39.1 IC1.B2 IC9.A1 IC9.A2 IC9.A3 TP_VREG.TP

## Tracks (layer width: path | path; a pad name or v marks a point on that pad's centre or on a via)
3V3  (via drill 0.2, 0.3)
  Top 0.268: IC2.C2 39.23,23.16 37.84,23.16 C34.2 37.71,23.23 37.05,23.23
  Top 0.3: C14.1 34.41,13.05 33.98,13.48 U1.P$B1 | C14.1 34.93,12.91 | TP_3.3V.TP 36.45,11.5 36.45,9.54 | R7.2 32.43,5.56 36.4,9.54 36.45,9.54 | IC9.E2 IC9.E3 37.25,29.05 C25.1 C33.1 39.42,30.3 R18.1 40.38,30.96 v40.38,31.56 41.37,32.55 TP_3V3.TP | R8.2 20.3,6.54 | 20.3,6.54 19.97,6.88 19.97,10.02 J2.1 | R5.2 10.64,5.82 12.94,5.82 14.37,4.39 17.5,4.39 | IC3.7 37.47,17.62 37.84,17.26 38.52,17.26 | U1.P$AD23 C8.1 | C8.1 C7.1 29.66,20.62 30.43,19.84 30.43,19.8 U1.P$AD14 | 20.3,6.54 20.3,5.57 19.12,4.39 17.5,4.39 | Q1.2 11.47,33.76 R_PWR_EPD.2 12.84,33.47 v13.17,33.8 | U1.P$A22 28.53,13.2 C12.1 28.77,12.22 29.76,11.24 v29.76,11.1 | U1.P$Y2 33.64,18.5 33.89,18.25 U1.P$W1 34.19,18.25 34.51,18.57 34.51,19.48 35.3,20.27 C6.1 36.01,20.71 36.55,21.25 36.54,21.26 36.54,22.72 | IC2.C2 39.3,23.08 | 37.05,23.23 36.54,22.72 | v37.59,8.8 37.24,8.8 36.51,9.54 36.45,9.54 | 17.5,4.39 v18.38,3.51 | C8.1 27.38,20.62 26.86,21.14 v26.86,21.55 | IC3.3 37.97,19.83 37.78,20.02 v36.76,20.02 | TP_3.3V.TP 39.2,14.25 C19.1 39.2,16.83 38.76,17.27 38.73,17.27 38.72,17.26 38.52,17.26 | TP_3.3V.TP 36.13,11.56 36.13,11.85 C14.1 | 36.54,22.72 36.53,22.72 35.97,23.28 v35.82,23.28 | IC3.10 38.97,17.71 38.52,17.26 | R17.1 32.13,28.53 v31.54,29.12
  pour Route15: 31.56,1.86 31.58,1.88 36.42,1.88 36.44,1.86 36.46,1.84 36.48,1.82 36.48,0.08 39,0.08 39.78,0.12 40.54,0.25 41.29,0.46 42,0.76 42.68,1.14 43.32,1.59 43.9,2.1 44.41,2.68 44.86,3.32 45.24,4 45.54,4.71 45.75,5.46 45.88,6.22 45.92,7 45.92,28 45.88,28.78 45.75,29.54 45.54,30.29 45.24,31 44.86,31.68 44.41,32.32 43.9,32.9 43.32,33.41 42.68,33.86 42,34.24 41.29,34.54 40.54,34.75 39.78,34.88 39,34.92 7,34.92 6.22,34.88 5.46,34.75 4.71,34.54 4,34.24 3.32,33.86 2.68,33.41 2.1,32.9 1.59,32.32 1.14,31.68 0.76,31 0.46,30.29 0.25,29.54 0.12,28.78 0.08,28 0.08,24.48 7.02,24.48 7.04,24.46 7.06,24.44 7.08,24.42 7.08,10.58 7.06,10.56 7.04,10.54 7.02,10.52 0.08,10.52 0.08,7 0.12,6.22 0.25,5.46 0.46,4.71 0.76,4 1.14,3.32 1.59,2.68 2.1,2.1 2.68,1.59 3.32,1.14 4,0.76 4.71,0.46 5.46,0.25 6.22,0.12 7,0.08 9.52,0.08 9.52,1.82 9.54,1.84 9.56,1.86 9.58,1.88 14.42,1.88 14.44,1.86 14.46,1.84 14.48,1.82 14.48,0.08 20.52,0.08 20.52,1.82 20.54,1.84 20.56,1.86 20.58,1.88 25.42,1.88 25.44,1.86 25.46,1.84 25.48,1.82 25.48,0.08 31.52,0.08 31.52,1.82 31.54,1.84
ALERT  (via drill 0.3)
  Top 0.127: v45.04,26.31 45.01,26.31 44.99,26.33 44.99,26.83 44.62,27.2 U3.5 | U1.P$J24 26.76,16.47 25.9,16.47 25.64,16.73 v25.03,16.73
  Route15 0.127: v45.04,26.31 45.05,26.3
  Bottom 0.127: v25.03,16.73 24.66,16.73 22.95,15.03 17.16,15.03 14.1,11.96 12.58,11.96 11.94,12.61 11.94,16.3 12.09,16.46 12.09,17.64 11.51,18.22 9.79,18.22 9.43,17.86 9.43,12.26 15.12,6.57 28.02,6.57 45.05,23.6 v45.05,26.3 v45.04,26.31
D+
  Top 0.15: U1.P$AD6 32.48,19.85 29.53,22.8 22.85,22.8 22.04,23.61 D3.4
D-
  Top 0.15: U1.P$AD4 29.64,23.09 29.15,23.09 arc-90 29.02,23.22 arc90 28.89,23.35 28.68,23.35 arc90 28.55,23.22 arc-90 28.42,23.09 28.22,23.09 arc-90 28.09,23.22 arc90 27.95,23.35 27.75,23.35 arc90 27.62,23.22 arc-90 27.49,23.09 27.28,23.09 arc-90 27.15,23.22 arc90 27.02,23.35 26.82,23.35 arc90 26.68,23.22 arc-90 26.55,23.09 26.35,23.09 arc-90 26.22,23.22 arc90 26.09,23.35 25.88,23.35 arc90 25.75,23.22 arc-90 25.62,23.09 25.41,23.09 arc-90 25.28,23.22 arc90 25.15,23.35 24.95,23.35 arc90 24.81,23.22 arc-90 24.68,23.09 24.54,23.09 23.94,23.69 D3.6
DEC1
  Top 0.15: C5.1 34.54,13.87 34.16,14.25 U1.P$C1
DEC3
  Top 0.15: U1.P$D23 27.83,14.35 27.59,14.35 27.05,13.8 C11.1
DEC4_6
  Top 0.15: U1.P$B5 32.73,12.24 C15.1 32.95,12.03 C16.1 C10.1 | C10.1 33.55,11.17 33.63,11.17 L3.2 | C10.1 32.95,10.29 31.99,9.33 25.41,9.33 24.88,9.86 24.88,13.58 25.73,14.43 27.16,14.43 U1.P$E24
DN
  Top 0.15: D3.1 23.75,26.9 J4.B7 23.75,29.63 23.58,29.8 22.93,29.8 22.75,29.62 J4.A7
DP
  Top 0.15: J4.B6 22.25,28.4 22.52,28.13 | 22.52,28.13 23.16,28.13 23.26,28.23 J4.A6 | 22.52,28.13 22.04,27.65 D3.3
EPD_3V3
  Top 0.3: J1.15 J1.16 | EPD_C5.2 J1.15 | C1-EP-DR.1 6.16,26.09 7.12,26.09 | 7.12,26.09 9.3,23.91 9.3,17.05 10.1,16.25 J1.15 | 7.12,26.09 7.24,26.21 L5.2 7.24,29.94 7.45,30.15 7.32,30.28 8.79,31.75 Q1.3
EPD_BUSY
  Top 0.15: U1.P$AD12 30.98,19.79 30.09,20.68 30.09,21.81 29.38,22.52 24.58,22.52 22.88,20.82 20.68,20.82 18.99,19.13 10.74,19.13 J1.9
EPD_CS  (via drill 0.2)
  Top 0.15: v9.91,17.75 J1.12
  Bottom 0.15: U1.P$K2 33.48,13.02 27.3,6.84 15.23,6.84 9.92,12.15 v9.92,17.75 v9.91,17.75
  other vias: 33.48,16
EPD_DC  (via drill 0.2)
  Top 0.15: v23.8,20.4 23.66,20.26 20.92,20.26 19.21,18.55 11.61,18.55 11.3,18.25 J1.11 | U1.P$AD10 31.48,19.95 31.2,20.23 v31.12,20.23
  Bottom 0.15: v31.12,20.23 23.97,20.23 v23.8,20.4
EPD_RST  (via drill 0.2)
  Top 0.15: v23.78,21.18 23.14,20.54 20.8,20.54 19.09,18.83 10.71,18.83 J1.10
  Bottom 0.15: U1.P$AC11 31.57,19.25 32.03,19.71 32.03,19.88 31.3,20.61 24.35,20.61 v23.78,21.18
  other vias: 31.23,19.25
GDR
  Top 0.152: J1.2 11.02,22.75 12.44,24.17 Q3.1 12.85,25.01 12.85,25.02 R2_EP_DR.2
GND  (via drill 0.2, 0.3, 0.35)
  Top 0.127: U1.P$74 30.73,16.22 30.41,15.9 U1.P$81 | C19.2 38.55,16.7 37.66,16.7 | R_TYPE_SEL.1 13.96,21.09 EPD_C2.1 | U1.P$B7 32.23,14.4 | C3.2 C22.2 C4.2
  Top 0.15: C5.2 C17.1 35.93,13.82 C14.2 | 31.84,11.89 C15.2 | 23.51,4.87 23.87,4.87 24.13,4.61 24.13,4.3 24.11,4.28 24.11,4.11 SW_ENT.1 | IC9.B1 IC9.C1 | IC9.C1 IC9.C2 IC9.C3 36.46,29.85 36.74,30.13 37.33,30.13 C25.2 | 42.61,27.16 U3.4 42.38,26.96 | 43.61,27.65 43.61,27.7 U3.6 | IC9.C1 C24.1 | C25.2 | C30.1 12.72,5.2 13.4,4.52 SW_UP.1 14.91,3.97 v15.89,2.99 | J4.A1_B12 26.45,28.73 | C43.2 26.45,26.73 | 22.99,26.15 D3.2 | EPD_C6.2 EPD_C7.2 EPD_C8.2 EPD_C10.2 | IC3.8 IC3.9 38.47,18.47 v38.35,18.59 | 30.16,33.29 TP_BAT_GND.TP | C7.2 C8.2 27.49,21.63 v27.49,21.89 | J2.5 J2.3 20.64,10.62 | J1.8 | 11.57,19.75 11.78,19.54 | 15.43,19.91 SJ1.1 | 38.8,30.82 C33.2 C25.2 | 39.05,26.39 IC1.D2 | U1.P$F23 28.63,15 U1.P$78 27.92,13.69 | 32.23,14.4 U1.P$75 | 36.83,33.68 v36.64,33.87 | R1_USB.1 24.8,27.79 | 43.6,28.25 U3.9 | C2.2 28.72,10.73 28.72,11.53 C12.2 | 25.95,10.29 X1.2 25.95,10.61 27.11,11.75 X1.4 27.41,12.23 C1.2 27.41,13.18 27.92,13.69 | 41.87,26.2 v42.05,26.02 | TP_GND.TP 42.38,3.48 | C11.2 26.05,13.58 | 5.07,26.08 C1-EP-DR.2 | 27.92,13.69 27.92,13.64
  Top 0.152: SJ1.1 | 18.89,29.09 18.68,29.3 J4.SH4 17.64,30.59 EPD_C9.2
  Top 0.3: C6.2 C20.2 C21.2 32.75,21.71 v32.39,22.07 | EPD_C5.1 11.82,15.25
  other vias: 25.23,5.15 41.6,10.78 36.19,17.89 42.74,22.81 27.56,5.96 26.17,5.99 24.32,8.25 23.25,10.42 24.37,10.57 24.1,15.11 23.49,14.62 23.71,8.92 26.12,8.2 25.54,8.78 24.83,9.26 24.35,9.93 24.36,11.45 24.35,12.34 24.36,13.16 24.63,13.99 25.98,14.89 26.78,14.91 23.22,13.75 23.27,12.95 23.29,11.98 23.26,11.2 23.25,9.58 24.63,15.64 26.14,15.92
  pour Route2: 9.35,2.07 9.37,2.09 37.1,2.09 37.12,2.07 38.87,0.33 45.71,7.17 45.71,28.44 40.76,33.39 39.93,33.39 39.91,33.41 38.6,34.71 6.71,34.71 0.3,28.3 0.3,24.77 6.95,24.77 6.97,24.75 7.34,24.38 7.36,24.36 7.36,10.46 7.34,10.44 7.14,10.24 7.12,10.22 0.38,10.22 0.38,5.91 5.8,0.49 9.21,0.49 9.23,0.47 9.29,0.41 9.29,2.01 9.31,2.03
  pour Top: 20.56,1.86 20.58,1.88 36.42,1.88 36.44,1.86 36.46,1.84 36.48,1.82 36.48,0.08 39,0.08 39.78,0.12 40.54,0.25 41.29,0.46 42,0.76 42.68,1.14 43.32,1.59 43.9,2.1 44.41,2.68 44.86,3.32 45.24,4 45.54,4.71 45.75,5.46 45.88,6.22 45.92,7 45.92,28 45.88,28.78 45.75,29.54 45.54,30.29 45.24,31 44.86,31.68 44.41,32.32 43.9,32.9 43.32,33.41 42.68,33.86 42,34.24 41.29,34.54 40.54,34.75 39.78,34.88 39,34.92 7,34.92 6.22,34.88 5.46,34.75 4.71,34.54 4,34.24 3.32,33.86 2.68,33.41 2.1,32.9 1.59,32.32 1.14,31.68 0.76,31 0.46,30.29 0.25,29.54 0.12,28.78 0.08,28 0.08,24.48 7.02,24.48 7.04,24.46 7.06,24.44 7.08,24.42 7.08,10.58 7.06,10.56 7.04,10.54 7.02,10.52 0.08,10.52 0.08,7 0.12,6.22 0.25,5.46 0.46,4.71 0.76,4 1.14,3.32 1.59,2.68 2.1,2.1 2.68,1.59 3.32,1.14 4,0.76 4.71,0.46 5.46,0.25 6.22,0.12 7,0.08 9.52,0.08 9.52,1.82 9.54,1.84 9.56,1.86 9.58,1.88 14.42,1.88 14.44,1.86 14.46,1.84 14.48,1.82 14.48,0.08 20.52,0.08 20.52,1.82 20.54,1.84
  pour Bottom: 20.56,1.86 20.58,1.88 36.42,1.88 36.44,1.86 36.46,1.84 36.48,1.82 36.48,0.08 39,0.08 39.78,0.12 40.54,0.25 41.29,0.46 42,0.76 42.68,1.14 43.32,1.59 43.9,2.1 44.41,2.68 44.86,3.32 45.24,4 45.54,4.71 45.75,5.46 45.88,6.22 45.92,7 45.92,28 45.88,28.78 45.75,29.54 45.54,30.29 45.24,31 44.86,31.68 44.41,32.32 43.9,32.9 43.32,33.41 42.68,33.86 42,34.24 41.29,34.54 40.54,34.75 39.78,34.88 39,34.92 7,34.92 6.22,34.88 5.46,34.75 4.71,34.54 4,34.24 3.32,33.86 2.68,33.41 2.1,32.9 1.59,32.32 1.14,31.68 0.76,31 0.46,30.29 0.25,29.54 0.12,28.78 0.08,28 0.08,24.48 7.02,24.48 7.04,24.46 7.06,24.44 7.08,24.42 7.08,10.58 7.06,10.56 7.04,10.54 7.02,10.52 0.08,10.52 0.08,7 0.12,6.22 0.25,5.46 0.46,4.71 0.76,4 1.14,3.32 1.59,2.68 2.1,2.1 2.68,1.59 3.32,1.14 4,0.76 4.71,0.46 5.46,0.25 6.22,0.12 7,0.08 9.52,0.08 9.52,1.82 9.54,1.84 9.56,1.86 9.58,1.88 14.42,1.88 14.44,1.86 14.46,1.84 14.48,1.82 14.48,0.08 20.52,0.08 20.52,1.82 20.54,1.84
  pour Route2: 7.06,10.56 7.04,10.54 7.02,10.52 0.08,10.52 0.08,7 0.12,6.22 0.25,5.46 0.46,4.71 0.76,4 1.14,3.32 1.59,2.68 2.1,2.1 2.68,1.59 3.32,1.14 4,0.76 4.71,0.46 5.46,0.25 6.22,0.12 7,0.08 9.52,0.08 9.52,1.82 9.54,1.84 9.56,1.86 9.58,1.88 14.42,1.88 14.44,1.86 14.46,1.84 14.48,1.82 14.48,0.08 20.52,0.08 20.52,1.82 20.54,1.84 20.56,1.86 20.58,1.88 25.42,1.88 25.44,1.86 25.46,1.84 25.48,1.82 25.48,0.08 31.52,0.08 31.52,1.82 31.54,1.84 31.56,1.86 31.58,1.88 36.42,1.88 36.44,1.86 36.46,1.84 36.48,1.82 36.48,0.08 39,0.08 39.78,0.12 40.54,0.25 41.29,0.46 42,0.76 42.68,1.14 43.32,1.59 43.9,2.1 44.41,2.68 44.86,3.32 45.24,4 45.54,4.71 45.75,5.46 45.88,6.22 45.92,7 45.92,28 45.88,28.78 45.75,29.54 45.54,30.29 45.24,31 44.86,31.68 44.41,32.32 43.9,32.9 43.32,33.41 42.68,33.86 42,34.24 41.29,34.54 40.54,34.75 39.78,34.88 39,34.92 7,34.92 6.22,34.88 5.46,34.75 4.71,34.54 4,34.24 3.32,33.86 2.68,33.41 2.1,32.9 1.59,32.32 1.14,31.68 0.76,31 0.46,30.29 0.25,29.54 0.12,28.78 0.08,28 0.08,24.48 7.02,24.48 7.04,24.46 7.06,24.44 7.08,24.42 7.08,10.58
HAPTIC_EN
  Top 0.15: IC2.A1 40.76,23.52 40.94,23.7 42.47,23.7 43.7,22.47 43.7,20.7 42.71,19.71 41.39,19.71 40.55,20.55 36.71,20.55 35,18.84 35,18.48 34.27,17.75 U1.P$U1
IMU_INT1
  Top 0.15: IC3.5 36.39,18.98 34.16,16.75 U1.P$N1
IMU_INT2  (via drill 0.2, 0.2 pad 0.25)
  Top 0.127: v36.72,18.48 IC3.6
  Bottom 0.15: U1.P$P2 34.66,17 36.14,18.48 v36.72,18.48
  other vias: 33.48,17
LX1
  Top 0.15: IC9.B2 IC9.B3 36.42,30.25 37.05,30.88 37.1,30.88 37.57,31.35 38.95,31.35 L7.1
LX2  (via drill 0.2, 0.3)
  Top 0.15: IC9.D2 IC9.D3 36.98,29.45 v37.17,29.64 | v37.2,32.68 37.35,32.83 L7.2
  Bottom 0.15: v37.2,32.68 37.17,32.65 v37.17,29.64
MOSI  (via drill 0.2)
  Top 0.15: v11.58,16.75 J1.14
  Bottom 0.15: U1.P$B13 30.6,13.62 30.6,10.94 27.08,7.42 15.45,7.42 11.58,11.29 v11.58,16.75
  other vias: 30.73,13.75
N$1
  Top 0.15: U1.P$N24 27.2,17.03 C9.1
N$2
  Top 0.15: C4.1 26.91,3.51 | C22.1 26.91,4.17 26.91,3.51 | 26.91,3.51 26.91,3.5 L1.2 28.2,4.08 ANT1.1
N$3
  Top 0.127: C3.1 26.88,6.59 23.86,9.6 23.86,14.03 25.2,15.37 27.6,15.37 27.73,15.5 U1.P$H23
  Top 0.15: C3.1 27.17,4.95 L1.1
N$4
  Top 0.15: U1.P$A18 29.62,13.12 C13.1
N$5
  Top 0.15: X1.3 27.91,10.47 C2.1 28.02,10.87 28.02,13.21 U1.P$A23
N$6
  Top 0.15: 27.46,13.73 U1.P$B24 27.45,13.75 26.91,13.21 C1.1 26.91,13.02 25.95,12.07 X1.1
N$7
  Top 0.15: L2.2 L3.1
N$8
  Top 0.15: U1.P$B3 33.65,13.33 L2.1
N$9
  Top 0.15: U1.P$F2 33.63,14.85 34.65,14.85 35.09,15.29 X2.2 35.09,16.23 C18.2
N$10
  Top 0.15: U1.P$D2 33.55,14.57 34.24,14.57 34.48,14.33 36.11,14.33 | 36.11,14.33 36.38,14.05 C17.2 | 36.11,14.33 36.89,14.33 37.59,15.03 X2.1
N$11
  Top 0.15: 40.02,19.57 R3.2 39.95,19.5 IC3.1
N$12
  Top 0.15: U1.P$AC5 32.87,19.39 33.62,19.39 34.38,20.15 C20.1
N$13
  Top 0.15: R9.2 39.02,25.84 IC1.D1
N$14
  Top 0.15: IC9.D1 34.96,29.45 34.64,29.13 R4.2
N$15
  Top 0.15: IC9.E1 35.51,28.92 35.75,28.68 R2.2
N$16
  Top 0.15: R1_EP_DR.1 13.62,21.89 R_TYPE_SEL.2 15.1,21.89 SJ1.2
N$17
  Top 0.152: C2-EP-DR.1 D2.1 16.73,22.47 17.29,21.91 D4.2
N$18
  Top 0.15: EPD_C2.2 11.78,21.75 J1.4
N$19
  Top 0.15: C2-EP-DR.2 14.41,26.38 D5.2 13.22,26.67 11.82,28.07 L5.1
  Top 0.152: Q3.3 14.41,24.06 C2-EP-DR.2
N$20
  Top 0.15: EPD_C1.2 11.36,21.25 J1.5
N$21
  Top 0.15: J1.18 10.34,14.75 9.09,13.5 9.09,10.17 EPD_C6.1
N$22
  Top 0.15: C32.2 40.95,22.82 40.76,23.02 IC2.A2
N$23
  Top 0.15: EPD_C7.1 9.07,9.42 9.37,9.72 9.37,13.29 10.33,14.25 J1.19
N$24
  Top 0.15: EPD_C8.1 9.65,9.56 9.65,13.07 10.33,13.75 J1.20
N$25
  Top 0.15: EPD_C10.1 9.93,10.22 9.93,12.35 10.33,12.75 J1.22
N$28
  Top 0.15: J1.24 12.31,11.75 EPD_C12.1
N$29
  Top 0.15: R2_USB.1 21.25,28.3 J4.B5
N$30
  Top 0.15: J4.A5 24.25,27.82 R1_USB.2
OUT+
  Top 0.15: TP_OP.TP 41.53,21.35 IC2.A3
OUT-
  Top 0.15: IC2.C3 38.61,21.77 TP_ON.TP
P0.13  (via drill 0.2)
  Top 0.15: R5.1 10.39,4.49 10.37,4.47 10.37,4.2 SW_UP.2 | C30.2 10.87,5.03 R5.1 | U1.P$AD8 31.98,19.92 30.76,21.14 v30.55,21.14 | R5.1 10.34,5.03 9.35,6.02 v9.35,6.16
  Route15 0.15: v30.55,21.14 30.45,21.04
  Bottom 0.127: v9.35,6.16 9.16,6.35 9.16,29.06 12.69,32.59 16.37,32.59 17.76,31.2 19.95,31.2 30.01,21.14 v30.55,21.14
P0.14  (via drill 0.2)
  Top 0.15: C31.2 21.57,5.03 R8.1 21.42,4.08 | 21.42,4.08 21.42,4 SW_ENT.2 | U1.P$AC9 v32.26,19.26 | v20.48,4.05 21.39,4.05 21.42,4.08
  Route15 0.15: v32.26,19.26 32.24,19.26
  Bottom 0.15: v32.26,19.26 32.31,19.31 32.31,20.06 30.82,21.55 29.99,21.55 20.07,31.48 17.88,31.48 16.49,32.86 12.57,32.86 8.89,29.18 8.89,5.99 10.83,4.05 v20.48,4.05
P1.01  (via drill 0.2)
  Top 0.15: Q1.1 11.46,31.86 11.77,32.17 R_PWR_EPD.1 11.77,32.51 12.1,32.18 v12.84,32.18 | v27.99,18.94 U1.P$Y23
  Bottom 0.15: v12.84,32.18 16.4,32.18 17.7,30.88 17.7,26.41 21.79,22.32 21.79,20.08 | v27.99,18.94 27.56,18.51 23.36,18.51 21.79,20.08 | 21.79,20.08
P1.02  (via drill 0.35 pad 0.25)
  Top 0.127: R7.1 31.82,5.01 28.16,8.67 v27.4,8.67 | v26.2,17.98 26.47,18.25 26.54,18.25
  Top 0.15: C29.2 32.56,5.17 R7.1 32.41,4.16 SW_DN.2 | 26.54,18.25 U1.P$W24
  Bottom 0.127: v27.4,8.67 25.49,10.58 25.49,17.27 v26.2,17.98
PMIC_INT  (via drill 0.2)
  Top 0.15: IC1.A1 36.78,24.93 v36.45,24.93 | v33.51,17.96 33.51,17.53 U1.P$T2
  Bottom 0.15: v36.45,24.93 36.45,20.87 33.54,17.96 v33.51,17.96
PREVGH  (via drill 0.2)
  Top 0.15: D5.1 14.54,30.59 EPD_C9.1 13.77,30.59 12.91,29.73 v12.91,29.22 | v12.34,13.25 J1.21
  Bottom 0.15: v12.91,29.22 12.37,28.68 12.37,13.28 v12.34,13.25
PREVGL  (via drill 0.2)
  Top 0.152: v12.85,12.44 12.66,12.25 J1.23 | D2.2 20.23,26.17 19.59,26.81 18.63,26.81 EPD_C11.1 v16.52,27.55 v16.51,27.54
  Bottom 0.152: v16.51,27.54 12.85,23.88 v12.85,12.44
RESE
  Top 0.15: R1_EP_DR.2 13.01,22.2 12.85,22.36 Q3.2
  Top 0.152: J1.3 11.28,22.25 11.9,22.87 Q3.2
RESET  (via drill 0.2)
  Top 0.15: J2.6 19.19,13.56 19.19,15.57 TP_RESET.TP 22.87,19.25 v23.32,19.25
  Bottom 0.15: U1.P$AC13 30.03,19.95 24.02,19.95 v23.32,19.25
  other vias: 30.73,19.25
SCK  (via drill 0.2)
  Top 0.15: U1.P$A12 v30.98,12.65 | J1.13 11.28,17.25 v11.57,17.55
  Bottom 0.15: v30.98,12.65 30.98,10.92 27.2,7.14 15.33,7.14 11.1,11.37 11.1,17.05 11.57,17.53 v11.57,17.55
SCL  (via drill 0.2)
  Top 0.127: IC3.12 v39.66,18.98
  Top 0.15: IC2.C1 39.32,23.56 39.3,23.56 38.6,24.26 | IC1.B1 38.15,24.71 38.6,24.26 | v32.59,30.06 32.59,29.88 R4.1 R17.2 | U3.7 44.92,28.2 45.48,27.65 45.48,25.8 v44.59,24.92 43.94,24.26 42.77,24.26 | 42.77,24.26 38.6,24.26 | TP_SCL.TP 44.39,22.63 42.77,24.26
  Bottom 0.15: U1.P$M2 33.58,16.5 33.81,16.27 36.85,16.27 39.56,18.98 v39.66,18.98 40.03,18.98 44.59,23.54 v44.59,24.91 v44.59,24.92 44.59,28.11 42.62,30.09 39.11,30.09 38.29,29.26 33.4,29.26 v32.59,30.06
  other vias: 33.48,16.5
SDA  (via drill 0.2)
  Top 0.15: TP_SDA.TP 43.25,30.5 v42.46,29.71 | v42.46,29.71 43.58,29.71 U3.8 | IC1.C1 38.63,25.84 38.63,24.84 v38.65,24.82 | R2.1 38.66,28.69 R18.2 39.77,29.76 39.96,29.95 41.98,29.95 42.22,29.71 v42.46,29.71 | U1.P$L1 34.07,16.25 34.51,16.69 v34.93,16.69 | v38.51,19.98 38.51,19.55 IC3.2
  Bottom 0.15: IC2.B2 39.86,23.58 38.65,24.79 v38.65,24.82 41.48,24.82 42.46,25.8 v42.46,29.71 42.46,23.92 38.53,19.98 v38.51,19.98 38.1,19.57 38.1,19.01 36.45,17.36 35.6,17.36 v34.93,16.69
  other vias: 39.86,23.02
SWDCLK
  Top 0.127: U1.P$AA24 27.29,18.56 24.98,18.56 23.83,19.7 21.16,19.7 19.46,18 16.13,18 14.17,16.04 TP_SWDCLK.TP
  Top 0.15: J2.4 17.52,10.62 15.95,10.62 14.17,12.4 TP_SWDCLK.TP
SWDIO
  Top 0.15: J2.2 18.22,10.05 18.22,7.62 17.88,7.28 TP_SWDIO.TP 16.52,5.83 14.96,7.39 14.96,11.17 12.89,13.24 12.89,15.14 16.02,18.27 19.34,18.27 21.04,19.97 23.95,19.97 25.09,18.83 27.06,18.83 U1.P$AC24
SWO
  Top 0.15: U1.P$AD22 28.12,19.39 27.84,19.39 26.15,21.08 TP_SWO.TP
VBAT
  Top 0.268: IC1.C2 38.56,26.47 38.92,26.83 | C27.2 41.56,27.34 | C27.2 40.86,27.64 | C27.2 C37.2 39.42,27.34
  Top 0.3: U3.2 U3.3 42.55,27.63 41.86,27.63 41.56,27.34 | TP_VBAT.TP 40.86,27.64 | 38.92,26.83 39.42,27.34
VBUS
  Top 0.15: J4.A9_B4 20.6,29.31
  Top 0.268: C38.2 36.12,25.88 36.14,25.86 36.14,25.69 | IC1.A2 36.97,26.31 | 24.77,25.42 C42.1 C43.1
  Top 0.3: C43.1 25.45,28.93 J4.A4_B9 25.4,29.53 24.76,30.17 21.23,30.17 20.6,29.54 20.6,29.31 | D3.5 22.99,25.1 23.31,25.42 24.77,25.42 24.76,25.42 26.44,23.74 30.07,23.74 | U1.P$AD2 C21.1 33.1,20.71 30.07,23.74 | 36.97,26.31 36.53,25.88 36.12,25.88 | 36.14,25.69 35.62,25.16 31.49,25.16 30.07,23.74
VREG
  Top 0.268: C23.2 37.52,31.86 | IC1.B2 38.16,26.61
  Top 0.3: 32.83,31.73 C24.2 33.91,30.65 IC9.A1 IC9.A2 IC9.A3 37.52,31.86 | 32.83,31.73 32.37,32.19 TP_VREG.TP | 38.16,26.61 38,26.77 C39.1 35.45,27.43 32.47,27.43 31,28.9 31,29.9 32.83,31.73
(copper drawn outside any net)
  shapes: Bottom area x1, Route15 area x1, Route2 area x1, Top area x1

## Text on the board
tPlace: TP GND | TP_VREG | L7 | Q1 | R_PWR_EPD | C24 | C23 | TP 3V3 | TP SDA | L5 | D5 | R18 | EPD_C9 | C25 | C33 | TP VBAT | R4 | IC9 | R2 | EDP_C11 | R2_USB | R17 | C1-EP-DR | R1_USB | C43 | C39 | IC1 | C37 | C27 | U3 | C42 | C38 | R9 | C2-EP-DR | D2 | C34 | IC2 | D3 | C32 | R1_EP_DR | R_TYPE_SEL | Q3 | D4 | TP SWO | C21 | C20 | C6 | TP OUT+ | C8 | C7 | EPD_C2 | TP OUT- | EPD_C1 | R3 | SJ1 | TP RESET | IC3 | C18 | C19 | EPD_C5 | TP_SWDCLK | C9 | X2 | C11 | C5 | C17 | C12 | C13 | C15 | C14 | L2 | EPD_C12 | C1 | C2 | C16 | C10 | L3 | TP 3V3 | EPD_C6 | EPD_C8 | X1 | EPD_C7 | EPD_C10 | ████████████████████████████████████████████████████████████████████████████████████████ / ████████████████████████████████████████████████████████████████████████████████████████ / ████████████████████████████████████████████████████████████████████████████████████████ / ████████████████████████████████████▒ ░▓██████████████████████████████████ / ████████████████████████████████▒ ▒▒░░ ░▒▓█████████████████████████████ / ████████████████████████████▒ ░░░░░░░░ ░░░░░ ▒▒ ▒▓████████████████████████ / ████████████████████████▒░ ░░░░░░░ ░ ░░░░░░ ░░ ░░▒▒▒▒▒░░ ░░▒████████████████████ / ██████████████████████▒ ░░░▒░ ░░░░░░░░ ░░░▒▒▒▒░░░ ░░██████████████████ / ████████████████████░ ░░▒▒▒▒▓▒▓▓▓▓░▒▒▒▒▒░░ ░▓▓░▒▒▒▒▒▓▓▓▒▓▓▓▓▒▒▒▒▓████████████████ / █████████████████▓░ ░░░▒░▒▓▒▒▒░▒▒░▒▒▒▒▒▒░▒▓▒▒░░▒ ▒░ ░░░▒▒▒▒▒▒░░▒▒▓░ ░▒▓██████████████ / ███████████████▓▒ ░░░░▒▒░░▒▒░░░▒▒▒░▒▒▒▒▒▒▒▒▓▓▓▒▒▒░▒▓▒░▒▓▓░░░░░░░▓▓▒▒▒░░░░░░░████████████ / ██████████████▒░░░░▒▒▒▒▒▒▒▒▒▒▒▒▒▓▒▒░▒▒▒▒▓▓▓▓▓▓▓▓▓▓▓▓▒▓▓▓▒░░░░░░▒█▓▒░░▒▒░▒▒▒░ ▒██████████ / ███████████▒░░░░░░▒▒▒▒▒▓▓▓▓▓██▓▓▓▓█▓▓▓▓▓▓▓▓▓▓▓▓▓▓▓▓▓▓█▓█▓▓██▓██▓▓▓▓▓▓▓▓▒▒▒▒▒▒▒░░████████ / █████████▓░░░░░░░▒▒▒▓▓▓▓█▓▓█▓█████▓██████▓█▓▓▓▓▓█████████████████▓▓█▓▒▓▓▒▒▒▒░▒▒░░███████ / █████████░ ░░░░▒▒▒▒▒▓▓▓▓█▓█████▓██▓▓████████████▓▓▓▓▓▓██▓▓▓▓▓▓▓▓▓▓▓██▓▓▓▓▒▒▒▒░▓▒░░▓█████ / ███████▓░░░▒▒▒▒▒▒▒▓▓▓▒▓▓▓▓██████████████████████████████████████▓▓▓▓▓▓▒▒▓▒▒▒░░░░▒▓▓█████ / ██████▓▓▓▒░▒▒▒▒▒▒▒▓▓▓▓▓▓▓▓▓▓▓▓▓███▓▓████▓▓█▓▓██████▓▓█████▓██▓▓▓███▓▓▓▓▒▒▒▒▒▒▓██████████ / ██████▒▓▒▒▒▒▒▒▒▒▒▒▒▒▓▒▓▓▓▓██████████████████████████████████▓▓█████▓▓█▓▒▒▒▓████▓▒▒▒▓▓███ / ▒███▓▓▒▒░░▒▒▒▒▒▒▒▒▒▒▒▓▓▓▓▓▓▓▓███████████████████████████▓▓██████████▓▓▓▓█▓▓▓▓▓▓▓▓▓▒▓▓███ / ▓█████▓▓░▒▓▒▒▒▒▒▒▓▒▒▓▓▓▓▓▓████▓██████████████████████▓██████████████▓▓████▓▓▓▓█▓▓▓▓█▓███ / ▓████▓▓▓▒▒▒▒▒▒▒▒▒▒▒▓▓▓▓▓█▓▓▓█▓██████████████▓▓▓▓▓▓█▓████████████████████▓▓▓▓▒▒▒▒▒▓▓▓▓███ / ▓▓██▓▒▓▓▒░▒▒▒▒▒▒▒▒▒▒▒▒▓▒▓▓▓▓▓▓▓▓▓▓▓▓▓▓▓▓▒▒▒▒▓▓▓▓█████▓███▓▓▓▓▓▓▓▓█▓▓████▓▓▓▓▓▓▓▒▒▓▓▒▒▓██ / ▒▓█▓▒▓░▒▒░▒░░▒▒▒▒▒▒▒▓▒▓▓▒▒▒▒▒▒▒▒░▒▒▒▒▒▓▓████▓▓██▓▓█████▓█████████▓▓███▓▓▒▒▓▓▓▓▓▓█▓▒▒▒▒██ / ▒███▓▓▒▒▒▒▒▒▒▒▒▒▒▒▒▒▒▒▒░▒▓▓▓█▓▒░▒▒▒▒▒▓▓▓▒▓▓▓▒▒▓▓▓▓▒░░░▒▒▒▒▓▓▓▓▓▓▓▓▒▒▒░▒▓▓█▓▓▓▒▒▒▒▒▓▓▓▓██ / ▒███▓▒▒░░▒▒░▒▒▒░ ░░░▒▒▒▒▒▒░░▒▓▓▓▓▓▓▓▓▒▓▓█▓▓▓▓▒▒▓▓▓▓▓▒▓▓▒▒▒██████████▓▒ ░▒▒▓▓▓▓▓▒▒░▓█ / ▒██▓▒▒▓▒▒▒▒▒▒░░░░░░▒▓▓▓▓▓▓▓▓▒▒▒▓▒▒▒▓▓█▓▓▓▓▓█▓▓█▓████████████▓▓█▓▓▓▓▓▓███▓▓▓▓▓▓▓▒▒▒▓▒▓░██ / ▒▓▒░ ░▒▒░░▒░░░░░▓▓▓▓▓▓▓▓▓█▓▓██▓▓▓▒▒░▒▒▓████▓▓▓▓▓▓▓▓▒▒░▒▓▒░░███████▓█▒▓▓▒▓▓▒░▒▒▒▓████▒▒ / ▒██▓▒▒▒▒▒▒▒░▒░▒▒▒▓▓▒▓▒▒▒▒▓▓▒▒▒▓▒▒▒▒░▒░▒▒▓▓▓██████▓▒▒▒▒▒░░ ▒░░ ▒▒░░░░░▒▒▒▓▓▒▒▒▒▒ / ▒████▓▒▒░░ ░ ░░▒▒░░░░ ▒▒▒▒▓▓▓█▓▓▓▒░░░░░░░░░ ░▓▓▒▒██████▓▒▓▓▒░ / ▒▒░░░▒░░░ ▒▒░▓▒▒░░░▒▒▓▓▓█▓▒▒▒▒▓▒▓█▓ ████▓▓▓▒▓▓▒▒▒▒▓█▓▓▓█▓░ / ░░ ░░░░░░░░░░▒░░░░░ ░ ▒▓░▒░░░▒▒▒▒▒▒░░▒░░▒▒▒▓▒▒▓▒░ ░ ░█▓▒▒░▓▓▒▒▒▒▒▒▒▓▓▒▒▒▓▒░ / ░░░░ ░░░░░▒░ ░░░▒░ ▒▒▒░▒▒▒▒▒░▒▒▒▒▒▒▒▒▒▒▒▒░▒░░░▓███████▓▒▒▒▓█▓▒▒▓▓▓▓▓█▓▒▒▒▒░▒ / ░▒▒ ░▒▒▒▒░▒▒▒▒▒░░ ▒▓██████▓▓▒▒▒▒▒▒░░▒▒░▒░░▒░░░░▒▒▓▓█▓██▓██▓███████▓▓▒▓▓▓▓▓▒▓▓▓▒▓▒ █ / ░░░░░░░░░▒░░░░▒▓▒▒▒▒▓▓▒▒▒▒▒░▒▒▓▓▓▒░ ░░▓▓████▓▒ ░██▓▓▓▒▒▒▓▒▒▒▒▒▒▒░░██▓▒▒▒░░▒▒░░▓░░▒ / ░▓░ ▒▒░░ ░░░ ░░░░░░░▒▒▒▒▓▒▒▒▓▓▓▓▓██▒░ ░▓▓▓▒▓▓▒▒▒▓▓▓▓▒▒▒▓▓▓▓██████▓▓▓▓█▓██▓▓▓▒▓▓▓▓█▓▒▒░ ░ / ▓▒ ░▒░░░▒▒▒░▒░░░░▒▒▒▒▒░▒▒▒▓▓▓▓▓▓▓▓░ ░▓▒ ▒▒▒░░ ░▓▒░ ▓▓█▓▓▓██████▓██▓▓▓▓▓█▓███▒ ░░░░░ / █▓░░░▓▒░ ░░ ░░░▒▒▒▒▒▒▓▒▓▓▓▒▓▓▓▓▓▒ ░░ ░░░ ▒▓▓██▓█▓▓▓▒▒▒▒▓▓▒▒▒▒▒▓▒▒▒▓▒▒▓▓▓▒▓ / █▓ ▒▒░░ ░░░░░▒▒▒░▒▒▓▒▓▓▓▓▓▓█▓▒▒░ ░░▓▓▓▓▓▓▒░░░▒▓▓█▓█████▓▓▓█▓▓██▓▓▓▓▓▓▒▒▒▒▓▓░▒▒░█ / ▒░ ▒░░░░▒░▒▒▒░░▒▒▒▒▒▓▓░▓▓▓▓▒▒▒▒▒▓▒▓▓▒▒▒▓▓▓▓▓▓▒▒▓█▓▓▓▓▓▓▒▒▓▓████▓▓▒▒▓▓▒▒▒▓▒▒▒▓▒▒▓▓░ / █▓░ ▒▒▒▒▒░░▒▒░▒▒░░░▒▒▒▓▓▓▓▒▒▒▒▒▒▒▒▓▓▓▒▓▓▓▒░░▓▓▓▓▒▒▒▓▓▓▓▓▓██▓▒▒▒▓▓▓▓▓▓▒▒░░▒░▒░▒▒▒▒ ░░ / ██░░ ░▒░ ░░░░░░▒▓▓▓▓▓▒▒▓▓▓▓▓▓▓▓█▒▓▒▒▒▒▒▒▒▒▒▒▒▒▓█▓▓▓▓▓▒▒▒▒░▒░░▒▒▒▒▒░▒▒▒▒▓▓▓▓▒▒░ ░▓ / ░ ░░░░░░░░░░░▒▒▒▓▒░▒▒▒░░░░ ░░▓▒▒▓▒▒▒▓▓▓▒▒▒▒░▒░░ ░░░▓░░░ / ░▒▒█░ ░░░░ ░ ░▒░ ░░ ░ ░▒░░▒░░░▒░▒▒▓▓▒░░░░▒▒░░░ / ░▒░ ░ ░░░░░░░░░░░░ ░░░ ░░ ░░░░▒░░░░ ░▒▒▓▒ ░▓██ / ░ ▒░ ░ ░░ ░░░░▒▒▒▓▓▓▓▓▓▓▓▓▓▓▒▒░ / ░ ░░ ░▒▒▒▒▒▓▒▒▓▓▒▓▒░░▒░ / ░ ░░ ░░░░░░▒▒▒░░░ ░ ░▒ / ░ ▒▒▓▓██▓▒░ ▒█ / ░░░ ░░░░ ░▒▒▒░ ░ / ░░ ░░░ ░░ ▓███ / ▒█████▓▓▒▒░░░ ░▒▓▒▓▓▓▓▓█▓███ / ░▒▓▓██████████████████████████████ / ░░ ░ ░░░░░▒▒▒▒▒▓▓██▓█████████▓█▓█████████████████████████▓▓▒ / ░░░░░▒▒▒▒▒▒▒▓▓▓▓██████████████████████████████████████▓▒▓▓▒▓▓ ░ ░▒ | R5 | C30 | C31 | R7 | R8 | C3 | L1 | C29 | TP GND | C4 | C22 | ANT1